# Altium PCB Capstone Control Board.PcbDoc
Units mil, origin at the board's own origin, x right, y up, seen from the top; angles counter-clockwise.
Board outline 2000 x 2945 mil, 4 copper layers (TOP SIGNAL, GND, POWER, BOTTOM SIGNAL), stack 61.811 mil thick; 100 components, 64 nets, 324 pads, 58 vias.
Unrouted connection lines stored in the file: 1.
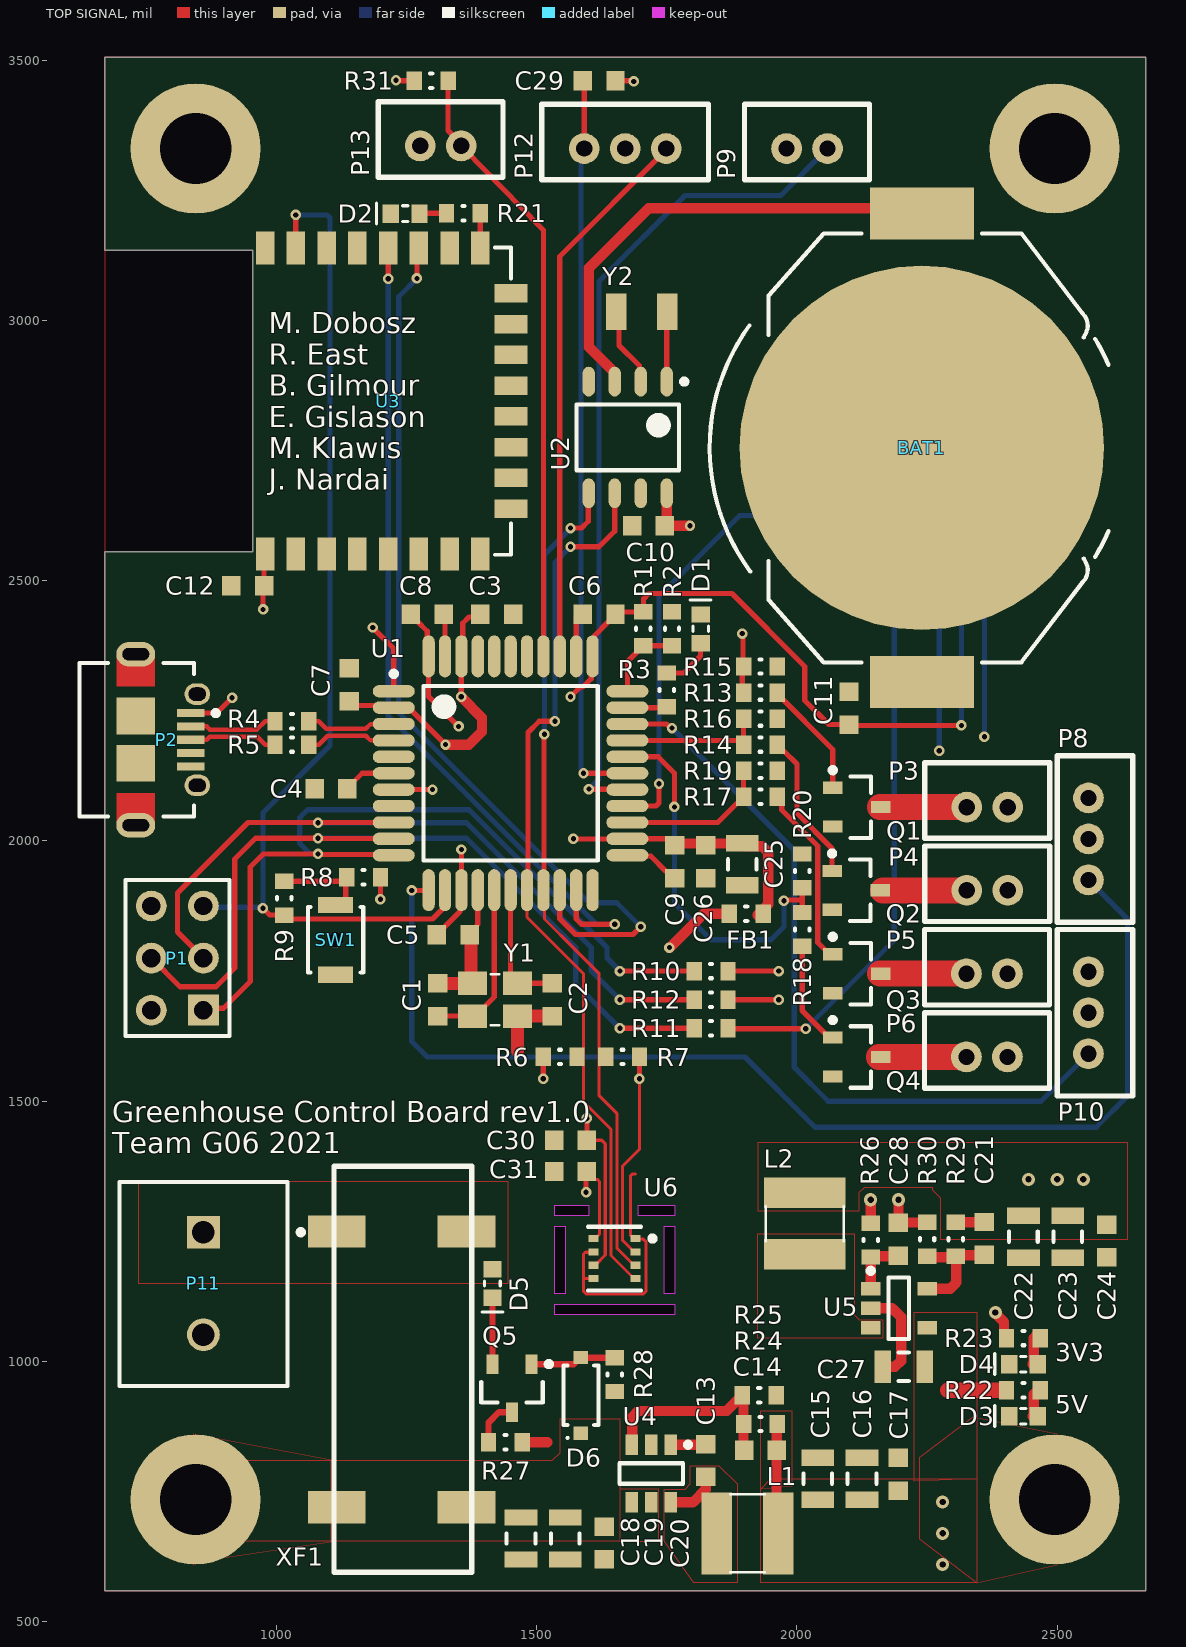
[diagram p0: TOP SIGNAL view]
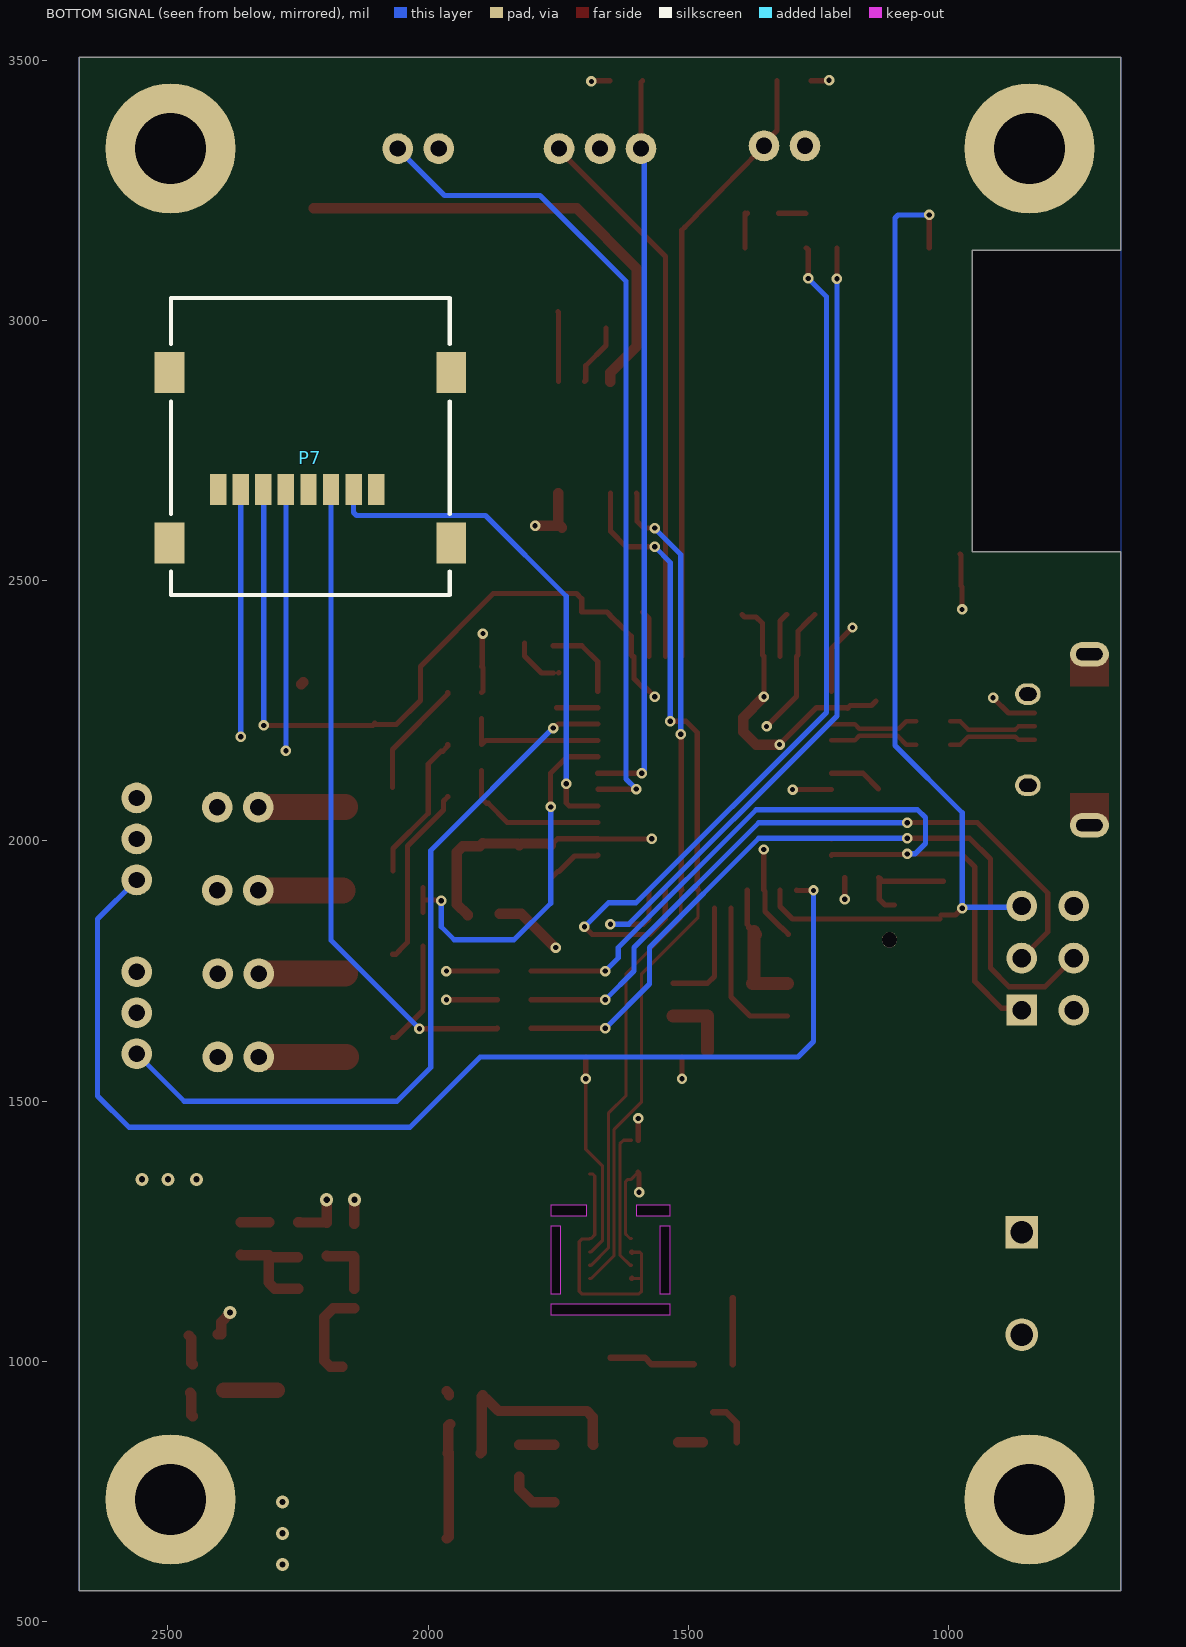
[diagram p1: BOTTOM SIGNAL view, seen from below]
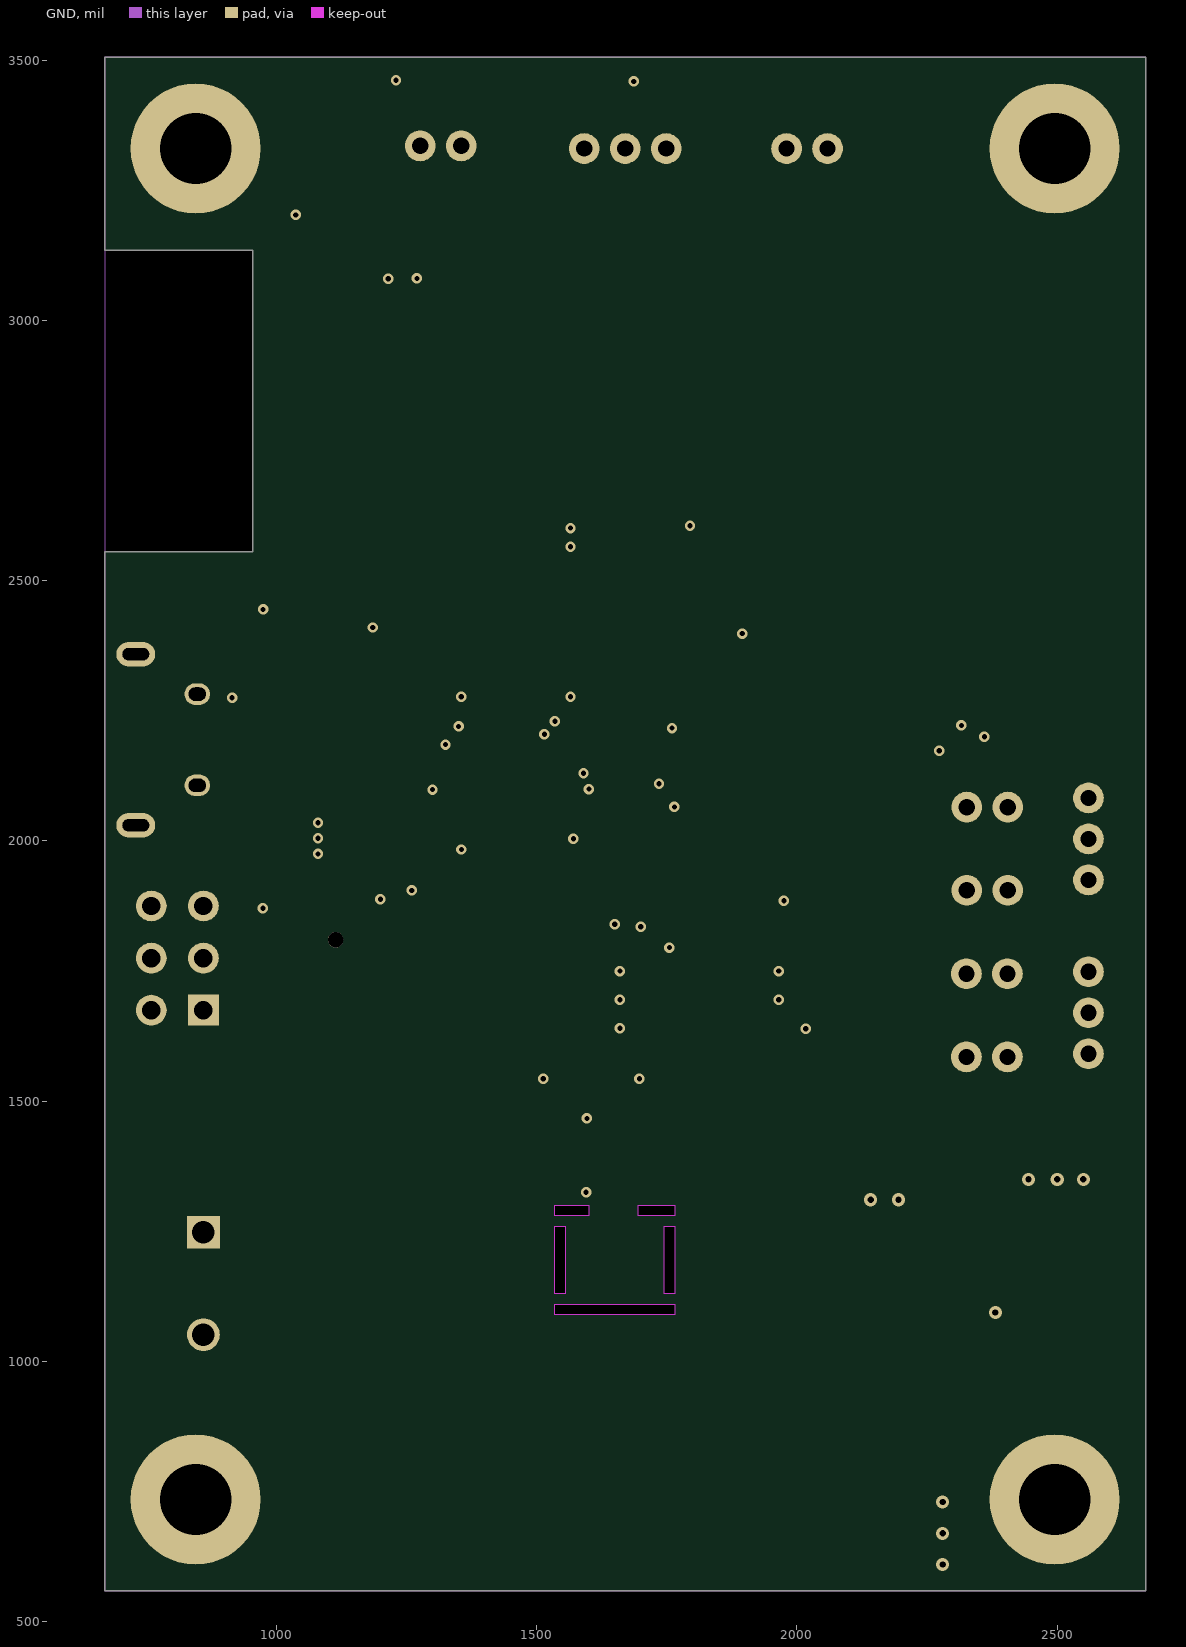
[diagram p2: GND]
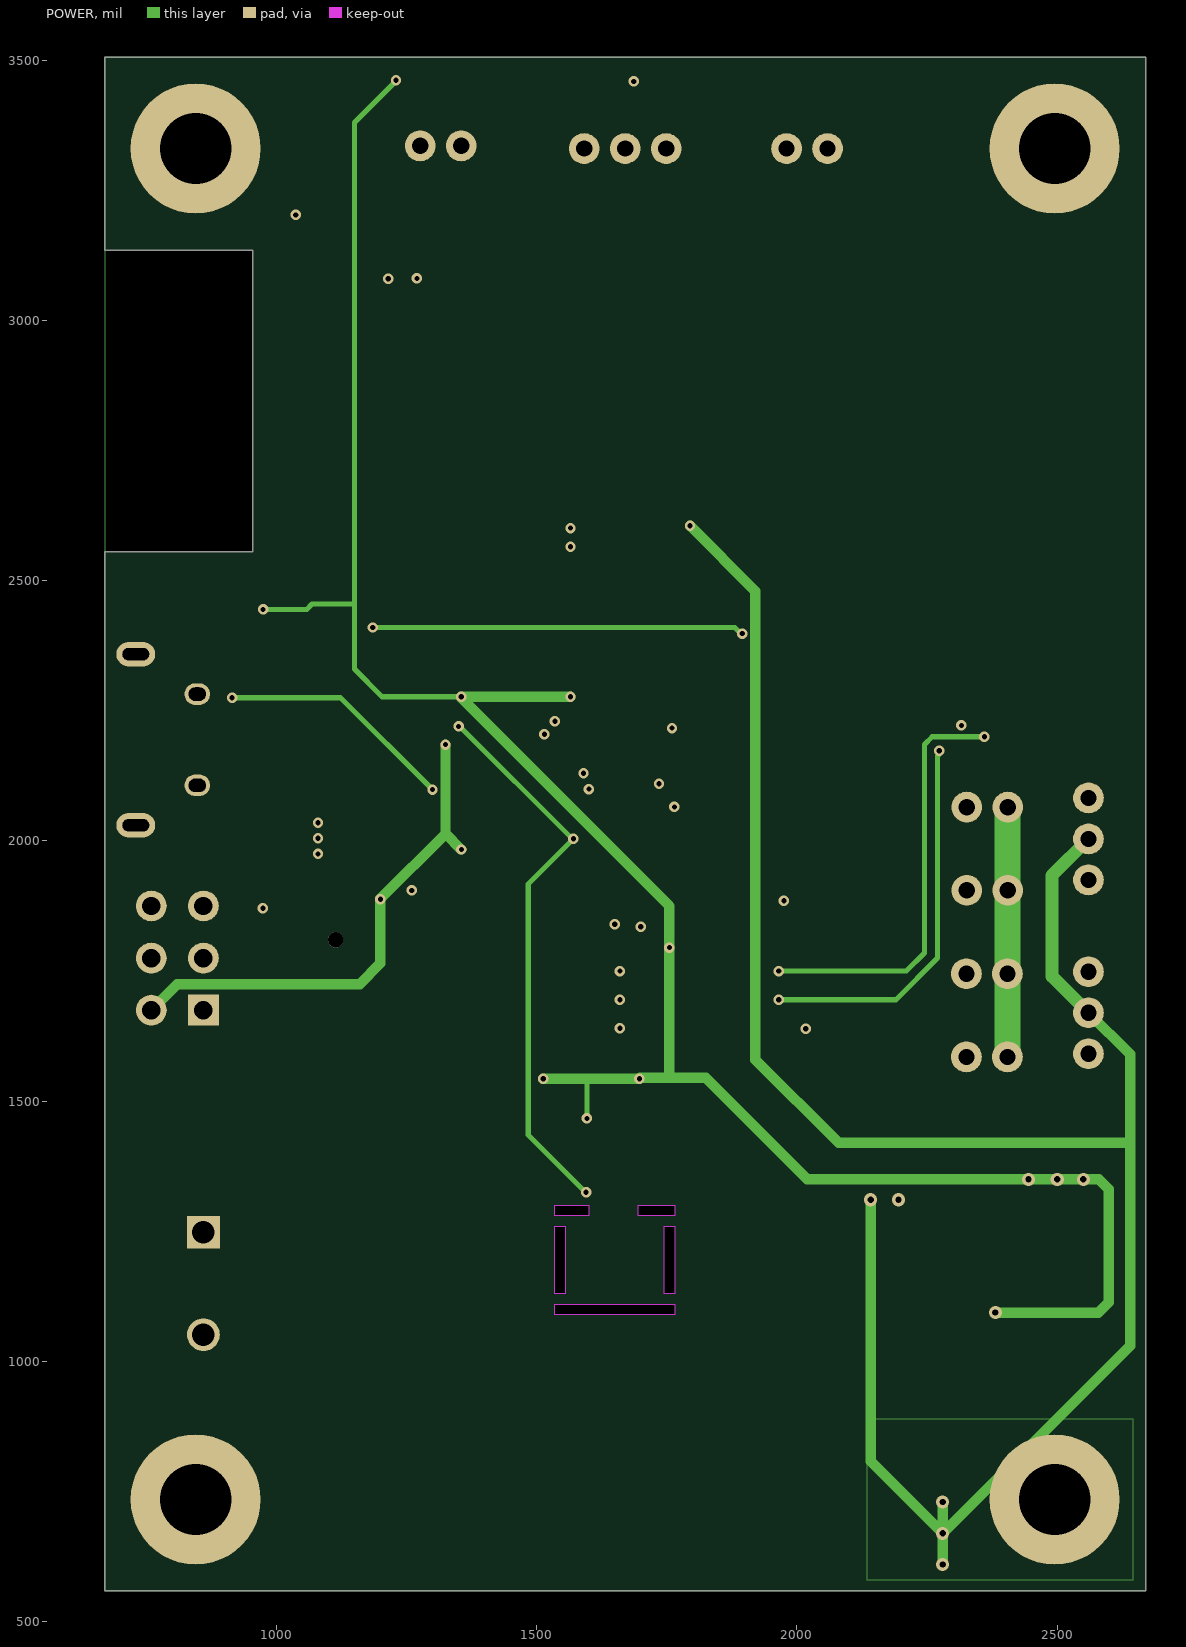
[diagram p3: POWER]
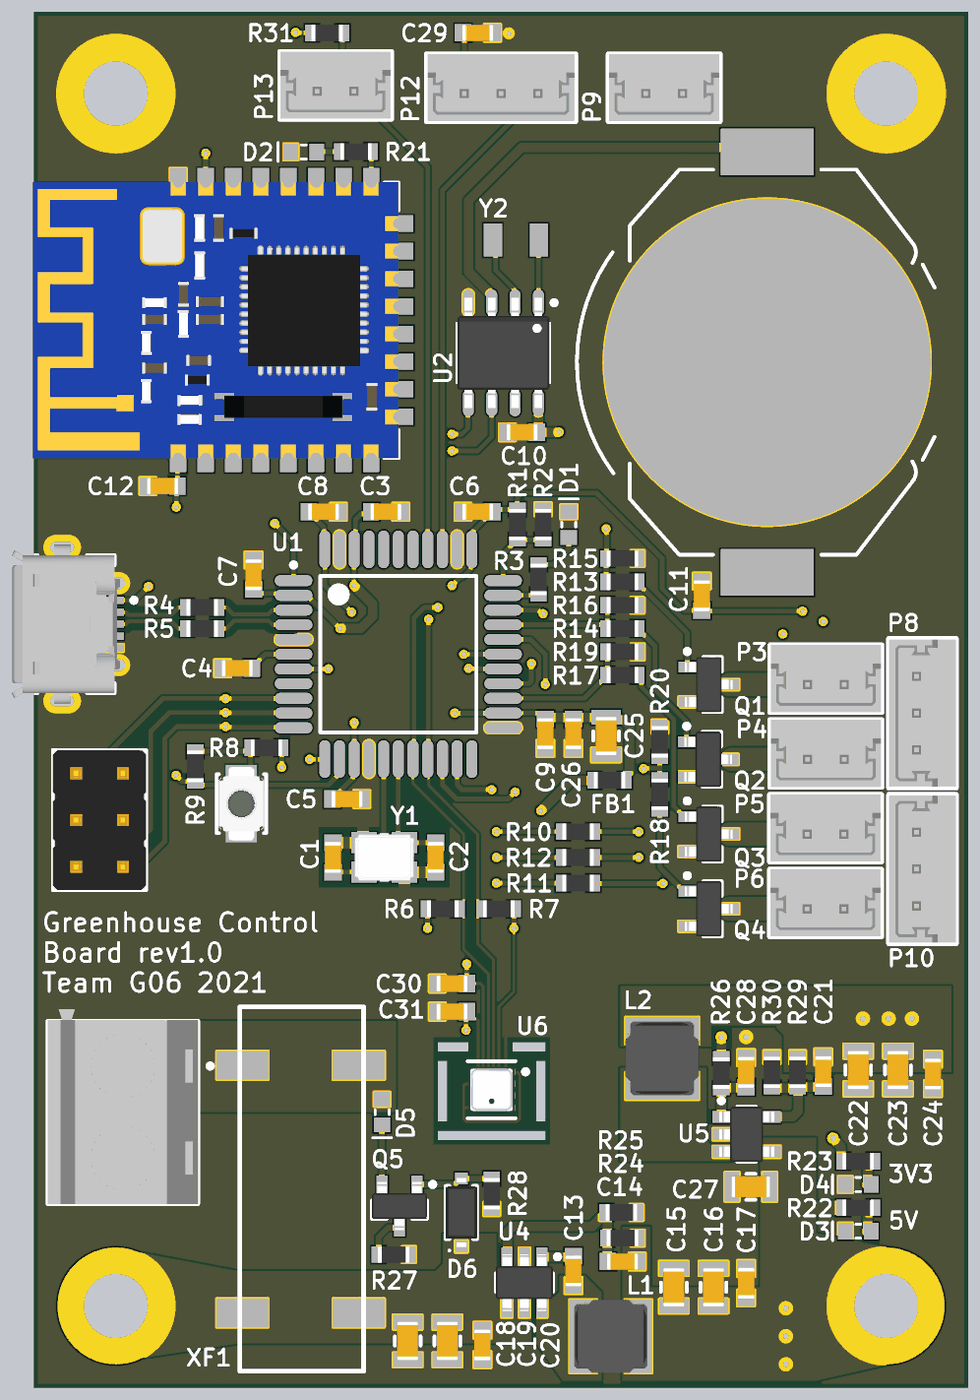
[diagram p4: 3D render of the assembled board from above, using the file's embedded part models]

## Layer stack, top to bottom
Top Solder: solder mask 0.5, Solder Resist, Dk 3.8
TOP SIGNAL: signal copper 1.378
Dielectric 1: prepreg 7.874, 7628, Dk 4.6
GND: signal copper 0.689
Core: core 41.929, FR-4, Dk 4.5
POWER: signal copper 0.689
Dielectric 2: prepreg 7.874, 7628, Dk 4.6
BOTTOM SIGNAL: signal copper 1.378
Bottom Solder: solder mask 0.5, Solder Resist, Dk 3.8

## Board outline
670,560 670,2555 955,2555 955,3135 670,3135 670,3505 2670,3505 2670,560
cut-out: 1765,1300 1765,1280 1695,1280 1695,1300
cut-out: 1600,1300 1600,1280 1535,1280 1535,1300
cut-out: 1555,1130 1535,1130 1535,1260 1555,1260
cut-out: 1765,1130 1745,1130 1745,1260 1765,1260
cut-out: 1765,1110 1765,1090 1535,1090 1535,1110

## Design rules (kind name [scope] priority, off if disabled: settings)
BoardOutlineClearance [All] p1: gap=7.87 ignorepadtopadclearanceinfootprint=FALSE
Clearance Clearance_1 [InNetClass('USB') vs InNet('GND')] p1: gap=4 ignorepadtopadclearanceinfootprint=FALSE except(5: Arc-Arc Arc-Track Arc-Via Track-Track Track-Via SMDPad-Via THPad-Via Via-Via Via-Fill Via-Poly Via-Region Via-Text; 9.84: Arc-Hole Track-Hole SMDPad-Hole THPad-Hole Via-Hole Fill-Hole Poly-Hole Region-Hole Text-Hole; 15: Arc-Fill Arc-Poly Arc-Region Track-Fill Track-Poly Track-Region)
Clearance [All] p2: gap=4 ignorepadtopadclearanceinfootprint=FALSE except(5: Arc-Arc Arc-Track Arc-Via Track-Track Track-Via SMDPad-Via THPad-Via Via-Via Via-Fill Via-Poly Via-Region Via-Text; 9.84: Arc-Hole Track-Hole SMDPad-Hole THPad-Hole Via-Hole Fill-Hole Poly-Hole Region-Hole Text-Hole)
ComponentClearance [All] p1: gap=4 collisioncheckmode=3 verticalgap=4 showdistances=TRUE
DiffPairsRouting DiffPair_USBDiffPairsRouting [All] p1: maxlimit=10 minlimit=5 mostfreqgap=10 toplayer_maxgap=5 toplayer_prefgap=5 toplayer_minwidth=8.58 toplayer_maxwidth=8.58 toplayer_prefwidth=8.58 impedanceprofiledriven=TRUE impedanceprofileid={44C31B51-6434-4A8B-99E2-7D32B7C9834D} impedanceprofilevalue=90.000000 maxuncoupledlength=500
DiffPairsRouting [All] p2: maxlimit=4 minlimit=4 mostfreqgap=4 toplayer_minwidth=4 toplayer_maxwidth=71497.94 toplayer_prefwidth=4 midlayer1_minwidth=4 midlayer1_maxwidth=71497.94 midlayer1_prefwidth=4 midlayer2_minwidth=4 midlayer2_maxwidth=71497.94 midlayer2_prefwidth=4 bottomlayer_minwidth=4 bottomlayer_maxwidth=71497.94 bottomlayer_prefwidth=4 maxuncoupledlength=500
Height [All] p1: minheight=0 maxheight=71497.94 prefheight=500
HoleSize [All] p1: absolutevalues=TRUE maxlimit=248.03 minlimit=7.87 maxpercent=80.000 minpercent=20.000
HoleToHoleClearance [All] p1: gap=9.84 allowstackedmicrovias=FALSE
MatchedLengths DiffPair_USBMatchedLengths [All] p1: tolerance=1000 checknetsindiffpair=TRUE checkdiffpairvsdiffpair=FALSE checkxsignals=FALSE checkothers=FALSE usedelayunits=TRUE delaytolerance=400.000000
MinimumAnnularRing [All] p1: minimumring=3
MinimumSolderMaskSliver [All] p1: minsoldermaskwidth=0
PlaneClearance [All] p1: clearance=4
PlaneConnect PlaneConnectPowerPads [InPadClass('PowerPads')] p1: planeconnectstyle=Direct reliefexpansion=20 reliefentries=4 reliefconductorwidth=10 reliefairgap=10
PlaneConnect [All] p2: pad.planeconnectstyle=Relief pad.reliefexpansion=11.81 pad.reliefentries=4 pad.reliefconductorwidth=4 pad.reliefairgap=4 via.planeconnectstyle=Direct via.reliefexpansion=11.81 via.reliefentries=4 via.reliefconductorwidth=5 via.reliefairgap=5
PolygonConnect PolygonConnectPowerPads [All vs (InPadClass('PowerPads'))] p1: connectstyle=Direct reliefconductorwidth=10 reliefentries=4 polygonreliefangle="90 Angle" airgapwidth=10
PolygonConnect [All] p2: connectstyle=Direct reliefconductorwidth=4 reliefentries=4 polygonreliefangle="90 Angle" airgapwidth=4
RoutingVias [All] p1: holewidth=7.87 width=17.72 viastyle="Through Hole" minholewidth=7.87 minwidth=17.72 maxholewidth=248.03 maxwidth=257.87
SilkToSilkClearance [All] p1: silktosilkclearance=0
SilkToSolderMaskClearance [IsPad] p1: minsilkscreentomaskgap=4 clearancetoexposedcopper=TRUE
SolderMaskExpansion [All] p1: expansion=2.95 istentingtop=FALSE
Width [All] p1: maxlimit=71497.94 minlimit=4 preferedwidth=4
20 further rules are at their usual default settings.

## Classes and differential pairs
net class USB: USB_D_N USB_D_P USBD_N USBD_P
component class Sensors: C29 C30 C31 P12 P13 R31 U6
component class Power: C13 C14 C15 C16 C17 C18 C19 C20 C21 C22 C23 C24 C25 C26 C27 C28 D3 D4 D5 D6 FB1 L1 L2 P11 Q5 R22 R23 R24 R25 R26 R27 R28 R29 R30 U4 U5 XF1
component class Peripherals: BAT1 C10 C11 C12 D2 P3 P4 P5 P6 P7 P8 P9 P10 Q1 Q2 Q3 Q4 R13 R14 R15 R16 R17 R18 R19 R20 R21 U2 U3 Y2
component class Controller: C1 C2 C3 C4 C5 C6 C7 C8 C9 D1 P1 P2 R1 R2 R3 R4 R5 R6 R7 R8 R9 R10 R11 R12 SW1 U1 Y1
differential pair USBD: +USBD_P -USBD_N
differential pair USB_D: +USB_D_P -USB_D_N

## Components (designator, comment, footprint, x,y, rotation, side; value= is the part's Value field where it differs from the comment)
BAT1 "BAT-HLD-001" BATHLD-001 2240,2755 r90 top locked
C1 "36pF" CAP0603 1310,1695 r270 top value=Value
C2 "36pF" CAP0603 1530,1695 r90 top value=Value
C3 "100nF" CAP0603 1423.5,2435 r180 top value=Value
C4 "1uF" CAP0603 1105,2100 r0 top value=Value
C5 "100nF" CAP0603 1340,1820 r180 top value=Value
C6 "100nF" CAP0603 1620,2435 r0 top value=Value
C7 "100nF" CAP0603 1140,2300 r270 top value=Value
C8 "100nF" CAP0603 1290,2435 r180 top value=Value
C9 "100nF" CAP0603 1765,1960 r90 top value=Value
C10 "100nF" CAP0603 1715,2605 r0 top value=Value
C11 "100nF" CAP0603 2100,2255 r270 top value=Value
C12 "100nF" CAP0603 945,2490 r0 top value=Value
C13 "100nF" CAP0603 1825,810 r90 top value=Value
C14 "47pF" CAP0603 1930,830 r0 top value=Value
C15 "10uF" CAP0805 2040,775 r270 top value=Value
C16 "10uF" CAP0805 2125,775 r270 top value=Value
C17 "100nF" CAP0603 2195,783.5 r270 top value=Value
C18 "22uF" CAP0805 1470,660 r90 top value=Value
C19 "10uF" CAP0805 1555,660 r90 top value=Value
C20 "100nF" CAP0603 1630,651.5 r90 top value=Value
C21 "22pF" CAP0603 2360,1236.5 r90 top value=Value
C22 "22uF" CAP0805 2435,1240 r90 top value=Value
C23 "10uF" CAP0805 2520,1240 r90 top value=Value
C24 "100nF" CAP0603 2595,1231.5 r90 top value=Value
C25 "10uF" CAP0805 1895,1955 r90 top value=Value
C26 "100nF" CAP0603 1825,1960 r90 top value=Value
C27 "22uF" CAP0805 2205,990 r0 top value=Value
C28 "100nF" CAP0603 2195,1235 r270 top value=Value
C29 "100nF" CAP0603 1620,3460 r180 top value=Value
C30 "100nF" CAP0603 1565,1425 r0 top value=Value
C31 "100nF" CAP0603 1565,1365 r0 top value=Value
D1 "Red" DIODE0603 1815,2407.44 r90 top
D2 "Blue" DIODE0603 1247.44,3205 r180 top
D3 "Green" DIODE0603 2435,895 r180 top
D4 "Green" DIODE0603 2435,995 r180 top
D5 "Red" DIODE0603 1415.2,1149.8 r270 top
D6 "1N4148W" SOD-123 1585,935 r90 top
FB1 "220R/100MHz" IND0603 1902.56,1860 r0 top value=Value
L1 "3.3uH" IND4X4X1.8 1905,670 r0 top
L2 "3.3uH" IND4X4X1.8 2015,1265 r90 top
P1 "3x2 2.54MM" HDR2X3 860,1675 r90 top
P2 "Micro USB" "MOLEX MICRO USB PORT" 789.06,2194.37 r270 top
P3 "Watering Valve" "MOLEX MICROLATCH 2CT" 2365.63,2065 r180 top
P4 "Intake Fan" "MOLEX MICROLATCH 2CT" 2365.63,1905 r180 top
P5 "LED Strip" "MOLEX MICROLATCH 2CT" 2365,1745 r180 top
P6 "Exhaust Fan" "MOLEX MICROLATCH 2CT" 2365,1585 r180 top
P7 "0472192001" "MOLEX MICRO SD" 2226.26,2736.02 r0 bottom
P8 "Servo 1" "MOLEX MICROLATCH 3CT" 2560,2003.74 r90 top
P9 "Heater" "MOLEX MICROLATCH 2CT" 2019.37,3330 r180 top
P10 "Servo 2" "MOLEX MICROLATCH 3CT" 2560,1670 r90 top
P11 "VIN" "SCREW TERMINAL 5MM" 860,1150 r270 top
P12 "SEN-13322" "MOLEX MICROLATCH 3CT" 1670,3330 r180 top
P13 "LDR" "MOLEX MICROLATCH 2CT" 1315.63,3335 r180 top
Q1 "PMV16XN" SOT-23 2115,2065 r0 top
Q2 "PMV16XN" SOT-23 2113.74,1905 r0 top
Q3 "PMV16XN" SOT-23 2115,1745 r0 top
Q4 "PMV16XN" SOT-23 2115,1585 r0 top
Q5 "BC858" SOT-23 1452.6,948.74 r270 top
R1 "0R" RES0603 1705,2407.52 r90 top value=Value
R2 "0R" RES0603 1760,2407.52 r90 top value=Value
R3 "300R" RES0603 1750,2290 r270 top value=Value
R4 "22R" RES0603 1030,2230 r0 top value=Value
R5 "22R" RES0603 1030,2185 r0 top value=Value
R6 "4K7" RES0603 1545,1585 r180 top value=Value
R7 "4K7" RES0603 1665,1585 r0 top value=Value
R8 "10K" RES0603 1167.48,1930 r0 top value=Value
R9 "330R" RES0603 1015,1890 r90 top value=Value
R10 "330R" RES0603 1835,1750 r180 top value=Value
R11 "330R" RES0603 1835,1640 r180 top value=Value
R12 "330R" RES0603 1835,1695 r180 top value=Value
R13 "100R" RES0603 1930,2285 r180 top value=Value
R14 "100R" RES0603 1930,2185 r180 top value=Value
R15 "1M" RES0603 1930,2335 r0 top value=Value
R16 "1M" RES0603 1930,2235 r0 top value=Value
R17 "100R" RES0603 1930,2085 r180 top value=Value
R18 "100R" RES0603 2010,1830 r90 top value=Value
R19 "1M" RES0603 1930,2135 r0 top value=Value
R20 "1M" RES0603 2010,1942.48 r90 top value=Value
R21 "60R" RES0603 1359.29,3205.71 r0 top value=Value
R22 "600R" RES0603 2435,945 r180 top value=Value
R23 "260R" RES0603 2435,1045 r180 top value=Value
R24 "150K" RES0603 1930,880 r0 top value=Value
R25 "20K" RES0603 1927.52,935 r180 top value=Value
R26 "100K" RES0603 2141.73,1233.27 r90 top value=Value
R27 "470R" RES0603 1440,845 r180 top value=Value
R28 "47K" RES0603 1650,975 r90 top value=Value
R29 "150K" RES0603 2305,1235 r90 top value=Value
R30 "33K" RES0603 2250,1235 r270 top value=Value
R31 "100K" RES0603 1297.48,3460 r180 top value=Value
SW1 "SPST-NO" "Tactile SPST-NO Switch" 1113.86,1810 r90 top
U1 "ATmega32U4-AU" 44ML_M 1450,2130 r0 top locked
U2 "DS1307Z+" "SOIC8 150mil" 1675,2775 r270 top
U3 "JDY-08" JDY-08 1065,2845 r180 top
U4 "SM8102E" SOT-23-6 1720,785 r270 top
U5 "LP3219" SOT-23-5 2195.87,1102.4 r0 top
U6 "BME280" BME280 1649.65,1197.8 r0 top
XF1 "2A Fuse" "ATO Fuse Holder SMD" 1240.59,985.04 r270 top
Y1 "8MHz 20pF" "3225 XTAL" 1420,1695 r0 top
Y2 "32.768kHz 12.5pF" "3210 XTAL" 1701.69,3016.5 r0 top

## Footprints (in the part's own frame and the unit in brackets; to place one, negate y for a bottom-side part, rotate by r counter-clockwise, add the part's x,y. Pads: shape width x height; smd on the part's side, far side on the other; paste and mask are expansions set on the pad)
44ML_M [mm] "Thin QFP, 44-Leads, Body 10x10mm, Pitch 0.8mm, IPC Low Density"
  oval 2.05x0.6 smd: 1(-5.7,4) 2(-5.7,3.2) 3(-5.7,2.4) 4(-5.7,1.6) 5(-5.7,0.8) 6(-5.7,0) 7(-5.7,-0.8) 8(-5.7,-1.6) 9(-5.7,-2.4) 10(-5.7,-3.2) 11(-5.7,-4) 23(5.7,-4) 24(5.7,-3.2) 25(5.7,-2.4) 26(5.7,-1.6) 27(5.7,-0.8) 28(5.7,0) 29(5.7,0.8) 30(5.7,1.6) 31(5.7,2.4) 32(5.7,3.2) 33(5.7,4)
  oval 0.6x2.05 smd: 12(-4,-5.7) 13(-3.2,-5.7) 14(-2.4,-5.7) 15(-1.6,-5.7) 16(-0.8,-5.7) 17(0,-5.7) 18(0.8,-5.7) 19(1.6,-5.7) 20(2.4,-5.7) 21(3.2,-5.7) 22(4,-5.7) 34(4,5.7) 35(3.2,5.7) 36(2.4,5.7) 37(1.6,5.7) 38(0.8,5.7) 39(0,5.7) 40(-0.8,5.7) 41(-1.6,5.7) 42(-2.4,5.7) 43(-3.2,5.7) 44(-4,5.7)
  silkscreen extent -5.82,-4.25 4.25,4.97, body extent -5,-5 5,5, height 1.2
"3210 XTAL" [mm]
  rect 1x1.8 smd: 1(-1.25,0) 2(1.25,0)
  body extent -1.6,-0.76 1.6,0.76, height 0.9
"3225 XTAL" [mm] "3225 XTAL"
  rect 1.4x1.15 smd: 1(-1.1,-0.8) 2(1.1,-0.8) 3(1.1,0.8) 4(-1.1,0.8)
  silkscreen extent -0.2,-1.25 0.2,1.25, body extent -1.6,-1.25 1.6,1.25, height 0.55
"ATO Fuse Holder SMD" [mm] "ATO Fuse Holder SMD"
  rect 1.57x2.82 smd: 1(-6.73,-3.16) 1(-6.73,3.16) 2(6.73,-3.16) 2(6.73,3.16)
  silkscreen extent -9.91,-3.3 9.9,3.43, body extent -9.91,-3.3 9.91,3.43, height 7.37
BATHLD-001 [mil] "LINX CR2032 BATTERY HOLDER"
  round 700 smd: 1(0,0)
  rect 100x200 smd: 2(-450,0) 3(450,0)
  silkscreen extent -412,-359 412,408, body extent -406,-389 406,409, height 169
BME280 [mm]
  rect 0.5x0.35 smd paste+0 mask+0: 1(1.025,0.975) 2(1.025,0.325) 3(1.025,-0.325) 4(1.025,-0.975) 5(-1.025,-0.975) 6(-1.025,-0.325) 7(-1.025,0.325) 8(-1.025,0.975)
  silkscreen extent -1.3,-1.55 1.97,1.55, body extent -1.25,-1.25 1.25,1.25, height 1
CAP0603 [mm] "0603 Capacitor"
  rect 0.9x0.95 smd: 1(-0.8,0) 2(0.8,0)
  body extent -0.85,-0.45 0.85,0.45, height 0.9
CAP0805 [mm] "0805 Capacitor"
  rect 0.8x1.6 smd: 1(-1.025,0) 2(1.025,0)
  silkscreen extent -0.25,-0.7 0.25,0.7, body extent -1.05,-0.58 1.05,0.58, height 1.35
DIODE0603 [mm] "0603 Diode"
  rect 0.8x0.9 smd: 1(-0.7,0) 2(0.7,0)
  silkscreen extent -0.13,-0.51 1.4,0.51, body extent -0.87,-0.48 0.87,0.48, height 0.5
HDR2X3 [mm] "Connector; Header; 3x2 Position"
  rect 1.5x1.5 hole 0.9: 1(0,0)
  round 1.5 hole 0.9: 2(0,2.54) 3(2.54,0) 4(2.54,2.54) 5(5.08,0) 6(5.08,2.54)
  silkscreen extent -1.27,-1.27 6.35,3.81, body extent -1.27,-1.27 6.35,3.81, height 8.89
IND4X4X1.8 [mm] "Inductor 4x4x1.8"
  rect 1.5x4 smd: 1(-1.5,0) 2(1.5,0)
  silkscreen extent -0.85,-1.9 0.85,1.9, body extent -2,-2 2,2, height 1.8
IND0603 [mm] "0603 inductor"
  rect 0.75x0.9 smd: 1(-0.825,0) 2(0.825,0)
  silkscreen extent -0.05,-0.35 0.05,0.35, body extent -0.85,-0.45 0.85,0.45, height 0.55
JDY-08 [mm]
  rect 0.9x1.6 smd: 1(2.2,7.47) 2(0.7,7.47) 3(-0.8,7.47) 4(-2.3,7.47) 5(-3.8,7.47) 6(-5.3,7.47) 7(-6.8,7.47) 8(-8.3,7.47) 17(-8.3,-7.47) 18(-6.8,-7.47) 19(-5.3,-7.47) 20(-3.8,-7.47) 21(-2.3,-7.47) 22(-0.8,-7.47) 23(0.7,-7.47) 24(2.2,-7.47)
  rect 1.6x0.9 smd: 9(-9.8,5.25) 10(-9.8,3.75) 11(-9.8,2.25) 12(-9.8,0.75) 13(-9.8,-0.75) 14(-9.8,-2.25) 15(-9.8,-3.75) 16(-9.8,-5.25)
  silkscreen extent -9.8,-7.49 -9.02,7.51, body extent -9.8,-7.51 10.09,7.51, height 2.08
"MOLEX MICRO SD" [mm]
  rect 0.8x1.5 smd: 1(-3.205,1.55) 2(-2.105,1.55) 3(-1.005,1.55) 4(0.095,1.55) 5(1.195,1.55) 6(2.295,1.55) 7(3.395,1.55) 8(4.495,1.55)
  rect 1.45x2 smd: 9(6.875,4.15) 10(6.875,-4.15) 11(-6.875,-4.15) 12(-6.875,4.15)
  silkscreen extent -6.8,-7.8 6.8,6.7, body extent -7.3,-7.79 7.3,6.71, height 1.91
"MOLEX MICRO USB PORT" [mm] "Molex Micro USB"
  rect 0.4x1.35 smd: 1(-1.3,1.175) 2(-0.65,1.175) 3(0,1.175) 4(0.65,1.175) 5(1.3,1.175)
  oval 1.2x1.9 hole 0.6 slot 1.3 at 90 deg: 6(-4.175,-1.5) 6(4.175,-1.5)
  oval 1.05x1.25 hole 0.65 slot 0.85 at 90 deg: 6(-2.225,1.5) 6(2.225,1.5)
  rect 1.8x1.9 smd: 6(-1.15,-1.5) 6(1.15,-1.5)
  TOP SIGNAL region: -2.6,-0.55 -4.175,-0.55 -4.175,-2.45 -2.6,-2.45
  TOP SIGNAL region: 2.6,-2.45 4.175,-2.45 4.175,-0.55 2.6,-0.55
  silkscreen extent -3.75,-4.25 3.75,2.53, body extent -4.32,-4.25 4.32,1.64, height 2.74
"MOLEX MICROLATCH 2CT" [mm] "532530270"
  round 1.5 hole 0.8: 1(-1,0) 2(1,0)
  silkscreen extent -3.05,-2.16 3.05,1.52, body extent -3,-2.15 3,1.5, height 5.55
"MOLEX MICROLATCH 3CT" [mm] "532530370"
  round 1.5 hole 0.8: 1(-2,0) 2(0,0) 3(2,0)
  silkscreen extent -4.06,-2.16 4.06,1.52, body extent -4,-2.15 4,1.5, height 5.55
RES0603 [mm] "0603 Resistor"
  rect 0.75x0.9 smd: 1(-0.825,0) 2(0.825,0)
  silkscreen extent -0.05,-0.35 0.05,0.35, body extent -0.85,-0.45 0.85,0.45, height 0.55
"SCREW TERMINAL 5MM" [mm] "Female Header, Pitch 5mm, 1 x 2 Position, Height 10mm"
  rect 1.6x1.6 hole 1.1: 1(-2.5,0)
  round 1.6 hole 1.1: 2(2.5,0)
  silkscreen extent -4.95,-4.1 5,4.88, body extent -5.6,-4.1 5,4.1, height 10
SOD-123 [mm] "SOD-123"
  rect 0.65x0.7 smd: 1(-1.85,0) 2(1.85,0)
  silkscreen extent -2.12,-0.85 1.45,0.85, body extent -1.88,-0.85 1.88,0.85, height 1.45
"SOIC8 150mil" [mm] "SOIC8 150mil"
  oval 1.45x0.6 smd: 1(-2.725,1.905) 2(-2.725,0.635) 3(-2.725,-0.635) 4(-2.725,-1.905) 5(2.725,-1.905) 6(2.725,-0.635) 7(2.725,0.635) 8(2.725,1.905)
  silkscreen extent -2.85,-2.5 1.6,2.88, body extent -3,-2.5 3,2.5, height 1.75
SOT-23 [mm] "SOT-23"
  rect 0.95x0.6 smd: 1(-1.175,0.95) 2(-1.175,-0.95) 3(1.175,0)
  silkscreen extent -1.3,-1.5 0.7,1.92, body extent -1.3,-1.5 1.3,1.5, height 1.2
SOT-23-5 [mm] "SOT-23-5"
  rect 0.95x0.65 smd: 1(-1.375,0.95) 2(-1.375,0) 3(-1.375,-0.95) 4(1.375,-0.95) 5(1.375,0.95)
  silkscreen extent -1.5,-1.5 0.5,1.95, body extent -1.5,-1.5 1.5,1.5, height 1.3
SOT-23-6 [mm] "SOT-23-6"
  rect 1x0.6 smd: 1(-1.4,0.95) 2(-1.4,0) 3(-1.4,-0.95) 4(1.4,-0.95) 5(1.4,0) 6(1.4,0.95)
  silkscreen extent -1.52,-1.55 0.5,1.93, body extent -1.55,-1.55 1.55,1.55, height 1.3
"Tactile SPST-NO Switch" [mm]
  rect 0.8x1.7 smd paste+0 mask+0: 1(-1.7,0) 2(1.7,0)
  round 0.75 hole 0.75 unplated paste-1000 mask+0: ""(0,0)
  silkscreen extent -1.6,-1.35 1.6,1.35, body extent -2.2,-1.45 2.2,1.45, height 0.25

## Part data
BAT1: library part CMP-0168-00043-1, "20mm Coin Cell Battery Holder", DatasheetVersion="rev1.0, Dec-2007", PackageDescription="Low Profile SM Battery Holder, 20mm Lithium Cell, 21.1 x 15.3 x 4.2 mm Body", PackageReference=BATHLD-001, PackageVersion="rev1.0, Dec-2007", PCB_Layout="Complies with manufacturer's recommendation."
C1 C2 C3 C4 C5 C6 C7 C8 C9 C10 C11 C12 C13 C14 C15 C16 C17 C18 C19 C20 C21 C22 C23 C24 C25 C26 C27 C28 C29 C30 C31: library part Capacitor, "Capacitor", LatestRevisionDate=17-Jul-2002, LatestRevisionNote="Re-released for DXP Platform.", PackageDescription="Radial Cap, Thru-Hole; 2 Leads; 0.3 in Pin Spacing", PackageReference=RAD-0.3, Published=8-Jun-2000, Publisher="Altium Limited"
D1 D2 D3 D4 D5: library part LED, "Light Emitting Diode", Code_JEDEC=DO-214-AB, LatestRevisionDate=17-Jul-2002, LatestRevisionNote="Re-released for DXP Platform.", PackageDescription="DO-214-AB/SMC; 2 C-Bend Leads; Body 7.9 x 5.9 mm, inc. leads (LxW)", PackageReference=SMC, PackageVersion=Sep-1996, Published=8-Jun-2000, Publisher="Altium Limited"
D6: library part Diode, "Diode"
FB1: library part Inductor, "Ferrite Bead", Code_IEC=1005, Code_JEITA=0402, LatestRevisionDate=29-May-2009, LatestRevisionNote="IPC-7351 Footprint Added.", PackageDescription="Chip Inductor", PackageReference=0402-A, Published=8-Jun-2000, Publisher="Altium Limited"
L1 L2: library part Inductor, "Inductor", Code_IEC=1005, Code_JEITA=0402, LatestRevisionDate=29-May-2009, LatestRevisionNote="IPC-7351 Footprint Added.", PackageDescription="Chip Inductor", PackageReference=0402-A, Published=8-Jun-2000, Publisher="Altium Limited"
P1: "Header, 3-Pin, Dual row", LatestRevisionDate=17-Jul-2002, LatestRevisionNote="Re-released for DXP Platform.", Publisher="Altium Limited"
P2: library part "Micro USB Connector", "Micro USB Connector"
P3 P4 P5 P6 P9 P11 P13: library part "2X1 2.54MM", "Header, 2-Pin", LatestRevisionDate=17-Jul-2002, LatestRevisionNote="Re-released for DXP Platform.", Publisher="Altium Limited"
P7: library part "Micro SD Card", "Micro SD Card"
P8 P10 P12: library part "3X1 2.54MM", "Header, 3-Pin", LatestRevisionDate=17-Jul-2002, LatestRevisionNote="Re-released for DXP Platform.", Publisher="Altium Limited"
Q1 Q2 Q3 Q4: library part MOSFET-N, "N-Channel MOSFET", LatestRevisionDate=17-Jul-2002, LatestRevisionNote="Re-released for DXP Platform.", PackageDescription="TO, Flat Index; 3 In-Line, Axial Leads; Body Dia. 4.6mm; Lead Dia. 0.5 mm (max)", PackageReference=E3, PackageVersion=1995/1996, Published=8-Jun-2000, Publisher="Altium Limited"
Q5: library part PNP, "PNP Bipolar Transistor", LatestRevisionDate=29-May-2009, LatestRevisionNote="IPC-7351 Footprint Added.", PackageDescription="3-Pin SOT-23 Package 0.95 mm Pitch, 2.4 mm Lead Span", PackageReference=SOT-23B, PackageVersion=Aug-1999, Published=8-Jun-2000, Publisher="Altium Limited"
R1 R2 R3 R4 R5 R6 R7 R8 R9 R10 R11 R12 R13 R14 R15 R16 R17 R18 R19 R20 R21 R22 R23 R24 R25 R26 R27 R28 R29 R30 R31: library part Resistor, "Resistor", LatestRevisionDate=17-Jul-2002, LatestRevisionNote="Re-released for DXP Platform.", PackageDescription="Axial Device, Thru-Hole; 2 Leads; 0.3 in Pin Spacing", PackageReference=AXIAL-0.3, Published=8-Jun-2000, Publisher="Altium Limited"
SW1: library part B3U-1000P-B, "SPST-NO Switch SMD", Ambient Temperature Range High=+70°C, Ambient Temperature Range Low=-25°C, Contact Current Rating=50mA, Contact Resistance=100mΩ, Manufacturer=Omron, Operating Force=1.5N, Package=0, Temperature="-25°C to +70°C", Voltage Rating Dc=12V, Automotive=No, Category=Switch, ComponentLink2Description=Datasheet, ComponentLink2URL=https://omronfs.omron.com/en_US/ecb/products/pdf/en-b3u.pdf, Device Class L1=Electromechanical, Device Class L2=Switches, Device Class L3="Tactile Switches", Digikey Description="SWITCH TACTILE SPST-NO 0.05A 12V", Electromechanical Life=200000Cycles, Height=1.75mm, Lead Free=Yes, Manufacturer Part Number=B3U-1000P-B, Mount="Surface Mount", Mouser Description="Tactile Switches Top Actuated with boss w/o ground", Octopart=https://octopart.com/b3u-1000p-b-omron-1057356, RoHS=TRUE, Temperature Range High=+70°C, Temperature Range Low=-25°C, Throw Configuration=SPST-NO
U1: library part CMP-0095-00285-2, "8-bit AVR Microcontroller, 2.7-5.5V, 16MHz, 32KB Flash, 1KB EEPROM, 2.5KB SRAM, USB Controller, 44-pin TQFP, Industrial Grade (-40°C to 85°C), Ext Osc", ComponentLink1Description="Manufacturer URL", ComponentLink1URL=http://www.atmel.com/, ComponentLink2Description="ATmega16U4/32U4 Datasheet", ComponentLink2URL=http://www.atmel.com/dyn/resources/prod_documents/doc7766.pdf, ComponentLink3Description="ATmega16U4 ATmega32U4 Summary", ComponentLink3URL=http://www.atmel.com/dyn/resources/prod_documents/7766S.pdf, DatasheetVersion="revF, Nov-2010", PackageDescription="44-Pin Plastic Thin Quad Flat Pack, 10 x 10 x 1.0 mm Body, 0.8 mm Pitch (TQFP)", PackageReference=44ML, PackageVersion="rev.G, Jul-2007", RevisionNote="DatasheetVersion updated. URLs added."
U2: "64 x 8, Serial, I2C Real-Time Clock, 5.0V, 8-Pin SO, 0 to 70 degC, Pb-Free", Code_IPC=SOIC127P600-8, Code_JEDEC=MS-012-AA, ComponentLink1Description="Manufacturer URL", ComponentLink1URL=http://www.maxim-ic.com, ComponentLink2Description=Datasheet, ComponentLink2URL=http://datasheets.maxim-ic.com/en/ds/DS1307.pdf, ComponentLink3Description="Package Specification", ComponentLink3URL=http://pdfserv.maxim-ic.com/package_dwgs/21-0041.PDF, DatasheetVersion=10-Feb-2008, PackageDescription="8-Pin Small-Outline IC, Narrow (0.15in), 1.27 mm Pitch, SOIC (N), Pb-Free", PackageReference=S8+2, PackageVersion="revC, 2010"
U3: "HM-11 JDY-08 Bluetooth module"
U4: "Adjustable VREG"
U5: "ADJ 1.5A buck convertor"
U6: "SENSOR PRESSURE HUMIDITY TEMP", Case/Package=LGA, Max Operating Temperature=85°C, Min Operating Temperature=-40°C, Accuracy=3%, Lead Free="Lead Free", Mount="Surface Mount", Number of Pins=8, Output Type=SPI, Packaging="Cut Tape", Response Time=1s, Sensor Type=Temperature
XF1: library part "ATO Fuse Holder", "Automotive Fuse Holder"
Y1: library part XTAL, "3225 XTAL", Package="SMD-4 Epson", Availability=Unavailable, MF=EPSON, MP="TSX-3225 16.0000MF18X-AC3", Price=None, SnapEDA_Link=https://www.snapeda.com/parts/TSX-3225%2016.0000MF18X-AC3/EPSON/view-part/105674/?ref=snap
Y2: library part "XTAL 3210", "XTAL 3210"

## Free pads (board coordinates)
  round 250 hole 137: 1(845,735) 1(845,3330) 1(2495,735) 1(2495,3330)

## Via types
v1: diameter 20, hole 10, TOP SIGNAL to BOTTOM SIGNAL, 49 vias
v2: diameter 25, hole 12, TOP SIGNAL to BOTTOM SIGNAL, 9 vias

## Nets (pads, with @x,y where several pads share a name; then routed paths per layer and width w, separated by ;. In a path a pad name is that pad's centre, name@x,y a point inside that pad or via, vN(x,y) a via of type N, cw(c..) or ccw(c..) an arc to the next point about the centre after c; other vN are vias at no path point)
5V: C10.2 C14.2 C15.2 C16.2 C17.2 C27.2 L1.2 P8.2 P10.2 pad.1@2495,735 R22.2 R24.2 R26.2 U2.8 U5.4 | length 4744.1
  TOP SIGNAL w20: C10.2@1742.99,2601.5 C10.2 C10.2@1750,2605 ; U2.8 C10.2@1750,2605 ; v1(1794.63,2605.37) 1794.25,2605 C10.2@1750,2605 ; R24.2@1957.48,880 1961.13,876.35 1961.13,825.36 C14.2@1962.59,823.91 ; C14.2@1960.77,825 1960.77,663.29 L1.2@1964.06,660 ; v2(2141.73,1310.75) R26.2 R26.2@2142.45,1265.03
  TOP SIGNAL w30: 2290,945 R22.2@2392.52,945
  POWER w20: v1@1795,2605 1920,2480 1920,1580 2080,1420 2640,1420 ; v2(2141.73,1310.75) 2141.73,808.27 v2(2280,670) ; v2(2280,610) v2(2280,670) ; v2(2280,730) v2(2280,670) ; P10.2 2640,1590 2640,1420 ; v2(2280,670) 2420,810 2640,1030 2640,1420
  POWER w25: P10.2 2490,1740 2490,1933.74 P8.2
12V: C18.2 C19.2 C20.2 D6.1 P3.1 P4.1 P5.1 P6.1 pad.1@845,735 U4.4 U4.5 XF1.2 | length 480.3
  POWER w50: P6.1 2404.69,1585.31 2404.69,2064.69 P3.1
A3V3: C8.2 C9.2 C25.2 C26.2 C31.2 FB1.2 U1.24 U1.44 U6.8 | length 2033.7
  TOP SIGNAL w6: C31.2 1596.5,1364.02 1611.21,1349.3 1617.36,1349.3 1620.87,1345.78 1620.87,1244.81 1616.13,1240.07 1612.24,1236.18 U6.8
  TOP SIGNAL w10: C8.2@1257.52,2435 1271.22,2421.3 1289.91,2402.61 1289.91,2357.02 U1.44 1292.52,2277.48 1326.2,2243.8 v1(1350,2220) ; v1(1570.58,2004.06) 1570.97,2003.67 1674.06,2003.67 U1.24 1751.5,2004.02 C9.2@1764.02,1991.5 ; v1(1595,1325) 1595,1361.39 C31.2@1597.25,1363.64
  TOP SIGNAL w20: C9.2 1768.5,1995 1821.5,1995 C26.2 1828.5,1995 1894.65,1995 C25.2 1900.75,1989.61 1933.28,1989.61 1945,1977.89 1945,1878.43 1924.37,1857.8 FB1.2@1924.37,1856.9
  POWER w10: v1(1350,2220) 1352.32,2220 1568.26,2004.06 v1(1570.58,2004.06) 1483.96,1917.44 1483.96,1435.01 1593.97,1325 v1(1595,1325)
BT_RX: U1.21 U3.20 | length 1633.6
  TOP SIGNAL w10: U3.20 1215,3138.7 v1(1215,3080) ; U1.21 1575.98,1850.24 1586.22,1840 v1(1650,1840)
  BOTTOM SIGNAL w10: v1(1215,3080) 1215,2240 1615,1840 v1(1650,1840)
BT_TX: U1.20 U3.19 | length 1773.5
  TOP SIGNAL w10: v1(1270,3080.41) 1270,3135.43 U3.19 ; U1.20 1544.57,1905.51 1544.57,1850.24 1574.81,1820 1685,1820 v1(1700,1835)
  BOTTOM SIGNAL w10: v1(1270,3080.41) 1235,3045.41 1235,2246.72 1600.61,1881.11 1653.89,1881.11 v1(1700,1835)
D3V3: C3.2 C5.2 C6.2 C7.2 C11.2 C12.2 C21.2 C22.2 C23.2 C24.2 C30.2 FB1.1 L2.2 P1.2 P7.6 R1.2 R6.2 R7.2 R8.2 R23.2 R29.2 R31.2 U1.2 U1.14 U1.34 U1.42 U3.1 U6.2 U6.6 | length 8790.2
  TOP SIGNAL w6: U6.6 1612.24,1185 1631.87,1204.63 1631.87,1418.13 1625,1425 C30.2@1610,1425 ; U6.2 1687.05,1210.59 1665,1232.64 1665,1375 1697.48,1407.48 v1(1697.48,1543.07)
  TOP SIGNAL w10: v1(974.5,2444.61) 974.5,2488.01 C12.2 976.5,2549.02 U3.1 ; C7.2 1148.5,2260 1189.35,2260 1194.88,2254.47 1196.4,2255.98 U1.2 1254.07,2255.98 1325,2185.06 v1(1325,2185) ; v1(1199.96,1888.07) R8.2 ; v1@1230.92,3460 R31.2 ; C5.2 1308.5,1820.98 1321.22,1833.7 1322.2,1833.7 1352.91,1864.4 1352.91,1902.98 U1.14 v1(1355.51,1983.5) ; v1(1355.19,2276.82) U1.42@1355.19,2354.73 ; U1.42 1358.12,2357.02 1358.12,2418.12 1370.15,2430.15 1392.16,2430.15 C3.2@1397.01,2435 ; v1(1512.52,1543.07) R6.2 ; v1(1565,2276.82) 1583.71,2295.53 1588.71,2295.53 1604.87,2311.69 U1.34@1604.87,2354.41 ; C30.2 v1(1596.5,1466.93) ; U1.34 1610.09,2357.02 1610.09,2393.26 1638.13,2421.3 1638.78,2421.3 1651.5,2434.02 C6.2 1656.5,2440 R1.2 1705,2465 1715,2475 1875,2475 2015,2335 2015,2270 2061.5,2223.5 C11.2 ; v1(1697.48,1543.07) R7.2 ; C11.2@2102.5,2226 2106.59,2221.91 v1(2315.85,2221.91)
  TOP SIGNAL w20: v1(1325,2185) 1370,2185 1395,2210 1395,2237.01 v1(1355.19,2276.82) ; v1(1755,1795) 1756.07,1795 1821.07,1860 FB1.1@1862.44,1860 ; R29.2 2305.26,1267.74 2359.74,1267.74 C21.2 ; v2(2380.96,1094.04) 2380.96,1092.69 2397.76,1075.89 2397.76,1052.72 R23.2@2404.04,1052.72
  POWER w10: v1(974.5,2444.61) 1058.45,2444.61 1068.75,2454.91 1150,2454.91 ; v1(1199.96,1888.07) v1@1199.96,1888.98 ; v1(1229.91,3461) 1229.91,3459.91 1150,3380 1150,2454.91 ; v1(1355.19,2276.82) 1203.18,2276.82 1150,2330 1150,2454.91 ; v1(1596.5,1466.93) 1596.5,1543.07
  POWER w20: P1.2 810,1725 1160,1725 1199.96,1764.96 v1(1199.96,1888.07) ; v1@1199.96,1888.98 1325,2014.02 ; v1(1325,2185) 1325,2014.02 ; v1(1355.51,1983.5) 1325,2014.02 ; v1(1512.52,1543.07) 1596.5,1543.07 v1(1697.48,1543.07) 1699.41,1545 1755,1545 ; v1(1565,2276.82) v1(1355.19,2276.82) 1355.19,2274.81 1755,1875 v1(1755,1795) 1755,1545 ; v2(2380.96,1094.04) 2579.04,1094.04 2599.14,1114.14 2599.14,1330.86 2580.05,1349.95 2550.05,1349.95 v2(2550,1350) v2(2500,1350) v2(2445,1350) 2020,1350 1825,1545 1755,1545
  BOTTOM SIGNAL w10: v1(2315.85,2221.91) 2315.85,2674.23 P7.6
FAN1_CTRL: R14.2 R16.1 U1.30 | length 276.4
  TOP SIGNAL w10: U1.30 1889.53,2192.99 R14.2 R16.1
FAN2_CTRL: R18.2 R20.1 U1.29 | length 736.5
  TOP SIGNAL w10: U1.29 1733.5,2161.5 1765,2130 v1@1765,2065 ; v1(1975,1885) 1976.24,1886.24 2010,1886.24 ; R18.2 2010,1886.24 ; R20.1 2010,1886.24
  BOTTOM SIGNAL w10: v1(1764.63,2065.37) 1764.63,1880.37 1835,1810 1950,1810 1975,1835 v1(1975,1885)
GND: BAT1.1 C1.1 C2.1 C3.1 C4.1 C5.1 C6.1 C7.1 C8.1 C9.1 C10.1 C11.1 C12.1 C15.1 C16.1 C17.1 C18.1 C19.1 C20.1 C22.1 C23.1 C24.1 C25.1 C26.1 C27.1 C28.1 C29.1 C30.1 C31.1 D1.2 D2.2 D3.2 D4.2 P1.6 P2.5 P2.6 P7.4 P7.9 P7.10 P7.11 P7.12 P8.3 P9.2 P10.3 P11.2 P12.2 P13.2 pad.1@845,3330 pad.1@2495,3330 Q1.2 Q2.2 Q3.2 Q4.2 R2.2 R15.2 R16.2 R19.2 R20.2 R25.1 R27.1 R28.1 R30.1 SW1.1 U1.5 U1.15 U1.23 U1.35 U1.43 U2.4 U3.24 U4.2 U5.2 U6.1 U6.5 U6.7 Y1.2 Y1.4 | length 1550.5
  TOP SIGNAL w6: 1590.59,1159.41 U6.5 ; U6.7@1608.7,1210 1593.51,1210 1590,1206.49 1590,1160 1590,1135 1595,1130 1705,1130 1710,1135 1710,1230 1705,1235 1691.18,1235 U6.1 1687.05,1236.18 1680,1243.23 1680,1356.49 1683.51,1360 1690,1360
  TOP SIGNAL w10: C8.1@1311.5,2435 1324.02,2422.48 U1.43 ; C5.1 1374.09,1822.6 1384.21,1832.72 1384.21,1836.76 1387.01,1839.56 U1.15 ; U1.35 1575.98,2427.48 C6.1@1588.5,2440 ; U6.5@1608.7,1160 U6.5 ; U6.7@1608.7,1210 U6.7 ; C29.1 v1@1685.58,3460 ; U1.23 1676.1,1970.83 1719.17,1970.83 1748.78,1941.22 1751.3,1941.22 C9.1@1765,1927.52
  TOP SIGNAL w20: 1463.31,1611.69 1465,1610 ; R27.1 1520,845 ; R25.1 1960,937.95 R25.1@1964.76,942.72 ; U5.2 2182.6,1102.4 2200,1085 2200,1001.72 2188.28,990 C27.1 ; v2@2195,1305 C28.1 2195.49,1266.99 2246.56,1266.99 2247.05,1267.48 R30.1
  TOP SIGNAL w25: C1.1 Y1.4 1374.09,1729.09 C5.1@1374.09,1817.4 ; C5.1 C5.1@1374.09,1817.4 ; C5.1@1374.09,1826.36 1374.09,1822.6 C5.1@1374.09,1817.4 ; 1463.31,1596.69 1463.31,1611.69 Y1.2 C2.1
  other v1: 1686.58,3459
  other v2: 2195,1310.75
HEAT_CTRL: P9.1 U1.27 | length 1601.5
  TOP SIGNAL w10: v1(1600.37,2099.63) 1600.94,2099.07 1673.47,2099.07 U1.27@1673.66,2099.25
  BOTTOM SIGNAL w10: v1(1600.37,2099.63) 1620,2119.25 1620,3075 1785,3240 1968.74,3240 P9.1
LED_CTRL: R17.2 R19.1 U1.25 | length 295.3
  TOP SIGNAL w10: U1.25 1848.03,2035.51 1884.8,2072.28 1887.76,2072.28 1897.52,2082.05 R17.2 R19.1
LIGHT_SENSOR: P13.1 R31.1 U1.37 | length 1180.2
  TOP SIGNAL w10: R31.1 1329.96,3364.65 1355,3339.61 P13.1 1362.07,3327.74 1507.21,3178.78 1512.99,3172.84 U1.37
MISO: P7.7 R10.1 | length 1388.3
  TOP SIGNAL w10: R10.1 v1(1965,1750)
  POWER w10: v1(1965,1750) 2210,1750 2245,1785 2245,2185 2260,2200 v1(2360,2200)
  BOTTOM SIGNAL w10: P7.7 2360,2674.92 v1(2360,2200)
MISO_uC: P1.1 R10.2 U1.11 | length 1616.9
  TOP SIGNAL w10: P1.1 863.67,1678.67 898.67,1678.67 950,1730 950,1950 975,1975 v1(1080,1975) 1081.24,1973.76 1224.35,1973.76 U1.11 ; v1(1660,1750) R10.2
  BOTTOM SIGNAL w10: v1(1080,1975) 1079.82,1975.18 1064.82,1975.18 1045,1995 1045,2045 1060,2060 1370,2060 1635,1795 1635,1775 v1(1660,1750)
MOSI: P7.3 R11.1 | length 1256
  TOP SIGNAL w10: R11.1 1868.35,1639.13 v1(2016.84,1639.13)
  BOTTOM SIGNAL w10: v1(2016.84,1639.13) 2186.77,1809.07 2186.77,2674.92 P7.3
MOSI_uC: P1.4 R11.2 U1.10 | length 1644.1
  TOP SIGNAL w10: P1.4 815,1720 884.14,1720 920,1755.86 920,1965 960,2005 v1(1080,2005) 1080.49,2004.51 1225.1,2004.51 U1.10 ; v1(1660,1640) R11.2
  BOTTOM SIGNAL w10: v1(1080,2005) 1365,2005 1575,1795 1575,1725 v1(1660,1640)
NetC4_2: C4.2 U1.6 | length 103
  TOP SIGNAL w10: C4.2@1135,2100 1165,2130 U1.6
NetC13_1: C13.1 L1.1 U4.6 | length 101.8
  TOP SIGNAL w20: U4.6 1800.39,729.88 1825,754.49 C13.1
NetC13_2: C13.2 U4.1 | length 67.6
  TOP SIGNAL w20: U4.1 C13.2@1825,840.12
NetC14_1: C14.1 R24.1 R25.2 U4.3 | length 396.9
  TOP SIGNAL w20: U4.3 1683.8,841.32 1683.8,893.28 1695.52,905 1865.04,905 1887.32,927.28 1890.28,927.28 1895.04,932.05 R25.2 1897.32,932.72 1897.32,876.71 1897.32,826.19 C14.1@1899.6,823.91
NetC21_1: C21.1 R29.1 R30.2 U5.5 | length 222.8
  TOP SIGNAL w20: U5.5 2250.2,1140 2294.58,1140 2306.3,1151.72 2306.3,1201.3 2305.65,1200.65 R30.2@2250.65,1200.65 ; R29.1 2306.24,1203.76 2358.76,1203.76 C21.1
NetC28_2: C28.2 R26.1 U5.1 | length 115.4
  TOP SIGNAL w20: U5.1 R26.1 2143.09,1202.15 2193.64,1202.15 C28.2
NetD1_1: D1.1 R3.1 | length 95.2
  TOP SIGNAL w10: R3.1@1748.7,2323.78 R3.1 ; R3.1@1760,2322.48 1782.48,2322.48 1814.99,2354.99 D1.1
NetD2_1: D2.1 R21.1 | length 52.1
  TOP SIGNAL w10: D2.1 1275.71,3205.71 R21.1
NetD3_1: D3.1 R22.1 | length 47
  TOP SIGNAL w20: D3.1@2452.56,895 2455.02,897.46 2455.02,937.54 R22.1@2457.48,940
NetD4_1: D4.1 R23.1 | length 58.1
  TOP SIGNAL w20: D4.1@2452.56,995 2455.02,997.46 2455.02,1045.02 R23.1@2460,1050
NetD5_2: D5.2 Q5.2 | length 127.5
  TOP SIGNAL w8.58: D5.2@1415,1122.44 D5.2
  TOP SIGNAL w12: Q5.2 D5.2
NetD6_2: D6.2 Q5.1 R28.2 | length 165.5
  TOP SIGNAL w12: Q5.1 1571.18,995 1584.02,1007.83 D6.2 1585.35,1007.48 R28.2
NetL2_1: L2.1 U5.3
NetP3_2: P3.2 Q1.3 | length 166.3
  TOP SIGNAL w50: Q1.3@2160,2065 P3.2
NetP4_2: P4.2 Q2.3 | length 161.3
  TOP SIGNAL w50: Q2.3@2165,1905 P4.2
NetP5_2: P5.2 Q3.3 | length 165.6
  TOP SIGNAL w50: Q3.3@2160,1745 P5.2
NetP6_2: P6.2 Q4.3 | length 168.1
  TOP SIGNAL w50: Q4.3@2157.48,1585 P6.2
NetQ1_1: Q1.1 R13.1 | length 226.6
  TOP SIGNAL w10: R13.1 1962.48,2282.05 2068.74,2175.79 Q1.1
NetQ2_1: Q2.1 R14.1 | length 287.8
  TOP SIGNAL w10: R14.1 1962.48,2182.05 1972.24,2172.28 1975.2,2172.28 2000,2147.48 2000,2053.1 2067.48,1985.62 Q2.1
NetQ3_1: Q3.1 R17.1 | length 350.8
  TOP SIGNAL w10: R17.1 1970.67,2076.81 1970.67,2059.5 2040,1990.17 2040,1975.18 2040,1958.16 2039.78,1957.94 2039.78,1805.22 2055.04,1789.96 2055.04,1789.21 2061.85,1782.4 Q3.1
NetQ4_1: Q4.1 R18.1 | length 203.5
  TOP SIGNAL w10: R18.1 2010,1674.25 2061.85,1622.4 Q4.1
NetQ5_3: Q5.3 R27.2 | length 90.9
  TOP SIGNAL w12: R27.2 1407.52,882.52 1427.48,902.48 Q5.3
NetR1_1: R1.1 R2.1 U1.33 | length 155.2
  TOP SIGNAL w10: U1.33 1674.41,2344.45 R1.1 R2.1
NetR3_2: R3.2 U1.32 | length 79.1
  TOP SIGNAL w10: U1.32 R3.2@1753.5,2255.98
NetR8_1: R8.1 R9.2 SW1.2 | length 201.8
  TOP SIGNAL w10: R9.2@1010,1922.48 1127.48,1922.48 R8.1@1133.46,1928.46 ; SW1.2@1105,1876.93 1122.72,1876.93 1133.46,1887.68 R8.1@1133.46,1928.46 ; R8.1 R8.1@1133.46,1928.46
NetR21_2: R21.2 U3.17 | length 72.7
  TOP SIGNAL w10: R21.2@1386.77,3205.71 R21.2@1391.06,3201.42 ; U3.17 R21.2
PUMP_CTRL: R13.2 R15.1 U1.1 | length 970.6
  TOP SIGNAL w10: v1(1185,2410) 1225.59,2369.41 U1.1 ; v1(1895,2398.33) 1896.26,2397.07 1896.26,2336.26 R15.1 1895,2332.48 1895,2287.52 R13.2
  POWER w10: v1(1185,2410) 1880.62,2410 1892.29,2398.33 v1(1895,2398.33)
RESET: P1.5 R9.1 U1.13 U3.23 | length 2024.8
  TOP SIGNAL w10: v1(974.26,1870.74) 987.48,1857.52 R9.1 ; R9.1@1017.52,1850 1300,1850 1324.02,1874.02 U1.13 ; U3.23 v1(1037.44,3202.44) v1@1040,3205
  BOTTOM SIGNAL w10: P1.5 862.35,1872.65 972.35,1872.65 v1(974.26,1870.74) 974.26,2054.26 1103.3,2183.3 1103.3,3196.58 1097.44,3202.44 v1(1037.44,3202.44)
SCK: P7.5 R12.1 | length 1337.1
  TOP SIGNAL w10: R12.1 v1(1965,1695)
  POWER w10: v1(1965,1695) 2190,1695 2270,1775 2270,2162.93 2271.47,2164.4 2271.47,2171.47 v1(2273.39,2173.39)
  BOTTOM SIGNAL w10: P7.5 2273.39,2674.92 v1(2273.39,2173.39)
SCK_uC: P1.3 R12.2 U1.9 | length 1507.6
  TOP SIGNAL w10: P1.3 810,1825 810,1900 945.51,2035.51 1079.49,2035.51 v1(1080,2035) 1080.26,2035.26 1225.33,2035.26 U1.9 ; v1(1660,1695) R12.2
  BOTTOM SIGNAL w10: v1(1080,2035) 1365,2035 1605,1795 1605,1750 v1(1660,1695)
SCL: R6.1 U1.18 U2.6 U6.4 | length 1716
  TOP SIGNAL w6: U1.18 1481.5,1853.5 1590,1745 1590,1585 1590,1498.88 1642.87,1446.01 1642.87,1203.58 1687.05,1159.41 U6.4
  TOP SIGNAL w10: U1.18 1483.25,1907.34 1483.25,2208.25 1505,2230 v1(1535,2230) ; v1(1565,2565) 1620,2565 1650,2595 U2.6
  BOTTOM SIGNAL w10: v1(1535,2230) 1535,2535 v1(1565,2565)
"SD CS": P7.2 U1.26 | length 979.3
  TOP SIGNAL w10: U1.26 1729.14,2067.01 1735,2072.87 v1(1735,2110)
  BOTTOM SIGNAL w10: v1(1735,2110) 1735,2470 1890,2625 2137.53,2625 2143.39,2630.86 P7.2
SDA: R7.1 U1.19 U2.5 U6.3 | length 1606.1
  TOP SIGNAL w6: U1.19@1515,1903.58 1515,1850 1575,1790 1620,1745 1620,1585 1620,1510.56 1654,1476.56 1654,1218.05 1687.05,1185 U6.3
  TOP SIGNAL w10: U1.19@1515,1903.58 U1.19 1514,1906.59 1514,2204 v1(1515,2205) ; v1(1565,2600.96) 1585.96,2600.96 1599.03,2614.03 1599.03,2666.75 U2.5
  BOTTOM SIGNAL w10: v1(1515,2205) 1515,2550 1565,2600 v1(1565,2600.96)
SEN_13322_SIG: P12.1 U1.36 | length 1071.5
  TOP SIGNAL w10: U1.36 1544.49,3122.62 1748.74,3326.87 P12.1 ; P12.1@1748.74,3343.74 P12.1@1748.74,3355
SEN_13322_VCC: C29.2 P12.3 U1.28 | length 1420.2
  TOP SIGNAL w10: C29.2 1591.26,3457.24 P12.3 ; v1(1590,2130) U1.28
  BOTTOM SIGNAL w10: v1(1590,2130) 1590,2132.71 1585,2137.71 1585,3323.74 P12.3
SERVO1_CTRL: P8.1 U1.12 | length 2237
  TOP SIGNAL w10: v1(1260,1905) 1291.93,1905 U1.12
  BOTTOM SIGNAL w10: v1(1260,1905) 1260,1615 1290,1585 1900,1585 2035,1450 2575,1450 2635,1510 2635,1850 P8.1
SERVO2_CTRL: P10.1 U1.31 | length 1467.6
  TOP SIGNAL w10: U1.31 1749.52,2224.49 1757.29,2216.72 v1(1760,2216.72)
  BOTTOM SIGNAL w10: v1(1760,2216.72) 1995,1981.72 1995,1565 2060,1500 2468.74,1500 P10.1
USB_D_N: R4.2 U1.3 | length 172.8
  TOP SIGNAL w8.58: R4.2 1081.53,2230 1096,2215.53 1171.99,2215.53 1180.95,2224.49 U1.3
USB_D_P: R5.2 U1.4 | length 173.8
  TOP SIGNAL w8.58: R5.2 1081.53,2185 1098.48,2201.95 1171.99,2201.95 1180.95,2192.99 U1.4
USBD_N: P2.2 R4.1 | length 171.3
  TOP SIGNAL w8.58: P2.2 866.18,2219.96 872.19,2213.96 962.42,2213.96 978.47,2230 R4.1
USBD_P: P2.3 R5.1 | length 171.1
  TOP SIGNAL w8.58: P2.3 866.18,2194.37 872.19,2200.38 963.09,2200.38 978.47,2185 R5.1
VBAT: BAT1.2 BAT1.3 U2.3 | length 911.4
  TOP SIGNAL w20: U2.3 1650,2899.02 1600,2949.02 1600,3100 1715,3215 BAT1.3@2220,3215 ; BAT1.2 BAT1.2@2243.75,2301.25
VBUS: P2.1 U1.7 | length 624.4
  TOP SIGNAL w10: P2.1 885.55,2245.55 v1(915,2275) ; U1.7 v1(1300,2098.5)
  POWER w10: v1(915,2275) 1123.5,2275 v1(1300,2098.5)
VIN: D5.1 P11.1 XF1.1
XTAL1: C2.2 U1.17 Y1.3 | length 216.3
  TOP SIGNAL w10: U1.17@1450,1870.59 1450,1739.8 Y1.3 C2.2
XTAL1_RTC: U2.1 Y2.2 | length 134.6
  TOP SIGNAL w10: U2.1 1750,3015.59 Y2.2
XTAL2: C1.2 U1.16 Y1.1 | length 294
  TOP SIGNAL w10: C1.2 Y1.1 1381.61,1663.5 1418.5,1700.39 U1.16@1418.5,1870.59
XTAL2_RTC: U2.2 Y2.1 | length 120
  TOP SIGNAL w10: Y2.1@1658.39,2985 1658.39,2951.61 1697.39,2912.61 1697.39,2884.89 U2.2
pads on no net: P2.4 P7.1 P7.8 SW1. U1.8 U1.22 U1.38 U1.39 U1.40 U1.41 U2.7 U3.2 U3.3 U3.4 U3.5 U3.6 U3.7 U3.8 U3.9 U3.10 U3.11 U3.12 U3.13 U3.14 U3.15 U3.16 U3.18 U3.21 U3.22

## Polygon pours and split planes (outlines as drawn)
GND on TOP SIGNAL "NONET_L01_P013" (solid, remove dead copper, shelved, pour order 13): 670,560 2670,560 2670,3505 670,3505
NetC13_1 on TOP SIGNAL "NONET_L01_P002" (solid, shelved, pour order 2): 1745,655 1745,755 1785,755 1795,765 1795,800 1850,800 1885,765 1885,575 1801.84,575
VIN on TOP SIGNAL "NONET_L01_P003" (solid, shelved, pour order 3): 1445,1345 735,1345 735,1150 1445,1150
12V on TOP SIGNAL "NONET_L01_P001" (solid, shelved, pour order 1): 1660,655 1735,655 1735,755 1660,755
12V on TOP SIGNAL "NONET_L01_P000" (solid, shelved, pour order 0): 765,810 1530,810 1545,825 1545,890 1660,890 1660,775 1660,655 765,655
5V on TOP SIGNAL "NONET_L01_P006" (solid, shelved, pour order 6): 1930,755 1930,905 1990,905 1990,760
5V on TOP SIGNAL "NONET_L01_P007" (solid, shelved, pour order 7): 2225,770 2225,1095 2345,1095 2345,775
12V on TOP SIGNAL "NONET_L01_P009" (solid, shelved, pour order 9): 1105,810 840,860 840,610 845,615 1110,655 1105,655
5V on TOP SIGNAL "NONET_L01_P010" (solid, shelved, pour order 10): 2235,660 2345,575 2500,610 2500,860 2337.5,892.5 2235,815
5V on TOP SIGNAL "NONET_L01_P005" (solid, shelved, pour order 5): 1930,575 1930,755 1950,775 2345,775 2345,575
NetL2_1 on TOP SIGNAL "NONET_L01_P011" (solid, shelved, pour order 11): 2110,1245 2110,1090 2120,1080 2165,1080 2165,1045 1925,1045 1925,1245
D3V3 on TOP SIGNAL "NONET_L01_P012" (solid, shelved, pour order 12): 1925,1290 2120,1290 2120,1325 2130,1335 2260,1335 2260,1330 2275,1315 2275,1235 2635,1235 2635,1420 1925,1420
12V on POWER "NONET_L03_P018" (solid, remove dead copper, shelved, pour order 18): 670,560 2670,560 2670,3505 670,3505
5V on POWER "NONET_L-01_P-001" (solid, shelved, pour order 15): 2135,890 2645,890 2645,580 2135,580
GND on BOTTOM SIGNAL "NONET_L04_P017" (solid, remove dead copper, shelved, pour order 17): 670,560 2670,560 2670,3505 670,3505
GND on GND "NONET_L02_P014" (solid, remove dead copper, shelved, pour order 14): 670,560 2670,560 2670,3505 670,3505

## Other copper
TOP SIGNAL:
  pour cut-out: 1525,1310 1775,1310 1775,1080 1525,1080
  pour cut-out: 2120,1288.25 2165,1288.25 2165,1335 2120,1335
  pour cut-out: 1280,1630 1280,1760 1560,1760 1560,1630
  pour cut-out: 710,1925 910,1925 910,1625 710,1625
GND:
  pour cut-out: 1525,1310 1775,1310 1775,1080 1525,1080
POWER:
  pour cut-out: 1525,1310 1775,1310 1775,1080 1525,1080
BOTTOM SIGNAL:
  pour cut-out: 1525,1310 1775,1310 1775,1080 1525,1080

## Silkscreen, mask and mechanical layers (free items; w line width, h text height)
Top Overlay:
  text "M. Dobosz / R. East / B. Gilmour / E. Gislason / M. Klawis / J. Nardai" at 985,2675 h40
  text "Greenhouse Control Board rev1.0  / Team G06 2021" at 685,1400 h40
  text "3V3" at 2496,1001 h35
  text "5V" at 2496,901 h35
Board Outline:
  lines w10: 670,560 670,2555 955,2555 955,3135 670,3135 670,3505 2670,3505 2670,560 670,560 ; 1535,1090 1765,1090 1765,1110 1535,1110 1535,1090 ; 1535,1130 1555,1130 1555,1260 1535,1260 1535,1130 ; 1535,1280 1535,1300 1600,1300 1600,1280 1535,1280 ; 1695,1280 1765,1280 1765,1300 1695,1300 1695,1280 ; 1745,1130 1765,1130 1765,1260 1745,1260 1745,1130

## Text inside footprints (layer, text, board x,y; h text height)
P2: Mechanical 1 "PCB EDGE" at 615,1980 h39.37 r270